# Altium PCB PCB1.PcbDoc
Units mm, origin at the board's own origin, x right, y up, seen from the top; angles counter-clockwise.
Board outline 15.24 x 19.05 mm, 2 copper layers (Top Layer, Bottom Layer), stack 1.173 mm thick; 6 components, 7 nets, 44 pads, 7 vias.
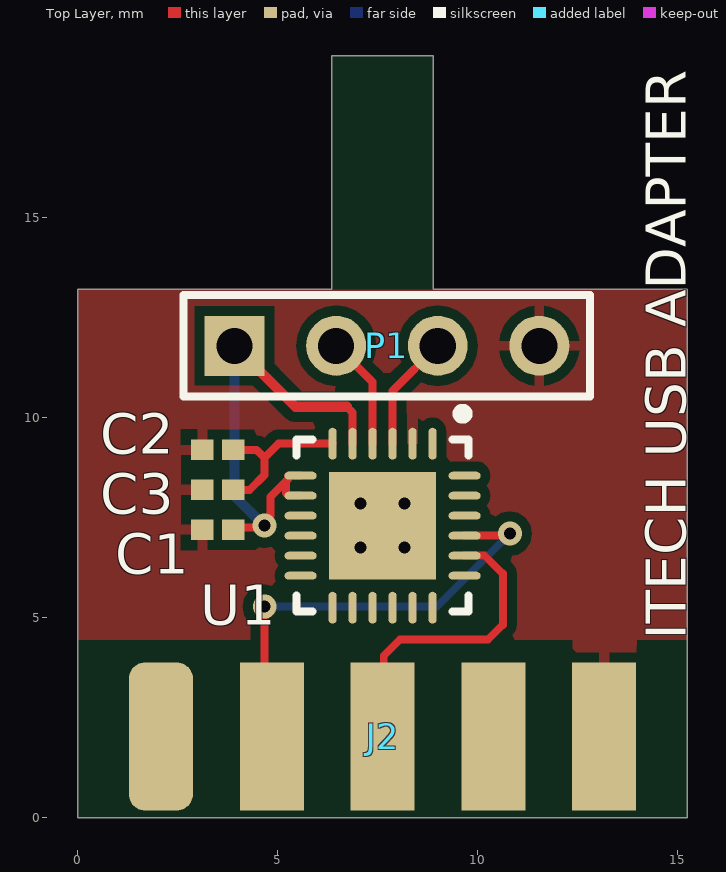
[diagram p0: Top Layer view]
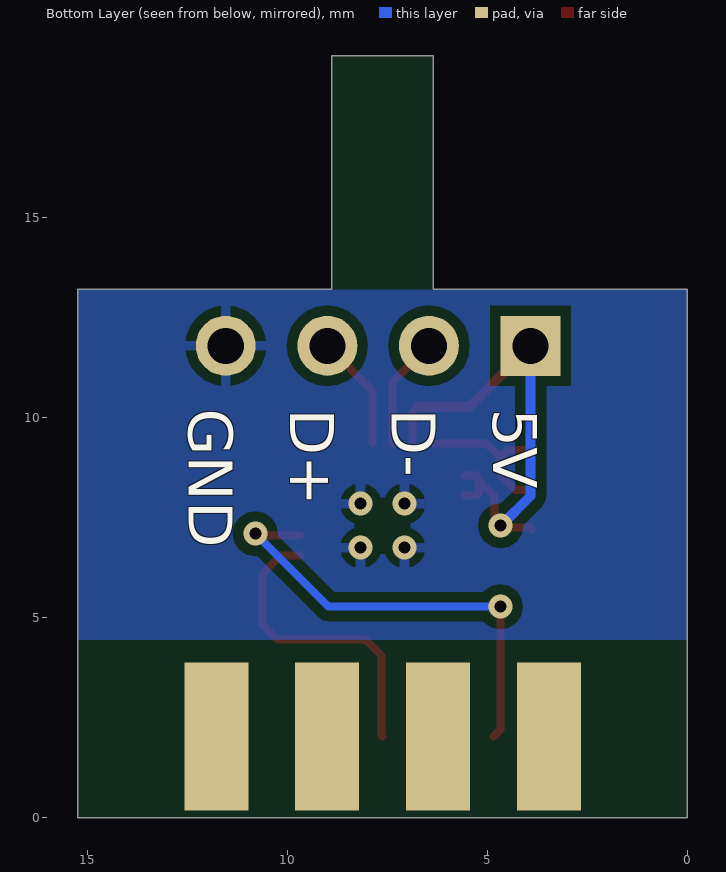
[diagram p1: Bottom Layer view, seen from below]

## Layer stack, top to bottom
Top Solder: solder mask 0.0127, Solder Resist, Dk 3.8
Top Layer: signal copper 0.0356
Dielectric 1: dielectric 1.102, FR-4, Dk 4.8
Bottom Layer: signal copper 0.0356
Bottom Solder: solder mask 0.0127, Solder Resist, Dk 3.8

## Board outline
0,0 0,13.208 6.35,13.208 6.35,19.05 8.89,19.05 8.89,13.208 15.24,13.208 15.24,0

## Design rules (kind name [scope] priority, off if disabled: settings)
Clearance [All] p1: gap=0.254 ignorepadtopadclearanceinfootprint=FALSE except(0: Arc-Hole Track-Hole SMDPad-Hole THPad-Hole Via-Hole Fill-Hole Poly-Hole Region-Hole Text-Hole)
PolygonConnect [All] p1: connectstyle=Relief reliefconductorwidth=0.254 reliefentries=4 polygonreliefangle="90 Angle" airgapwidth=0.254
RoomDefinition Sheet1 [InComponentClass('Sheet1')] p1: confinementstyle=ConfineIn formatcopy=TRUE lockcomponents=FALSE outline -14.1,-17.7 29.8,-17.7 29.8,25.5 -14.1,25.5
RoutingVias [All] p1: holewidth=0.711 width=1.27 viastyle="Through Hole" minholewidth=0.3 minwidth=0.6 maxholewidth=0.711 maxwidth=1.27
SolderMaskExpansion SolderMaskExpansion_via [isvia] p1: expansion=-99 istentingtop=FALSE
SolderMaskExpansion [All] p2: expansion=0.102 istentingtop=FALSE
Width [All] p1: maxlimit=0.254 minlimit=0.2 preferedwidth=0.254
30 further rules are at their usual default settings.

## Components (designator, comment, footprint, x,y, rotation, side; value= is the part's Value field where it differs from the comment)
C1 "1uF" CAPC1005X06L 3.5,7.2 r180 top
C2 "0.10uF" CAPC1005X06L 3.5,9.2 r0 top
C3 "4.7uF" CAPC1005X06L 3.5,8.2 r180 top
J2 "171-009-103L001" 171-009-103L001 7.62,2.032 r0 top
P1 "Header 4" HDR1X4 3.92,11.8 r0 top
U1 "CP2104-F03-GM" SLAB-QFN-24-2675x2675TP_M 7.62,7.3 r270 top

## Footprints (in the part's own frame and the unit in brackets; to place one, negate y for a bottom-side part, rotate by r counter-clockwise, add the part's x,y. Pads: shape width x height; smd on the part's side, far side on the other; paste and mask are expansions set on the pad)
171-009-103L001 [mm] "CONN D-SUB PLUG 9POS PNL MNT"
  rrect50% 1.6x3.7 smd: 1(-5.54,0)
  rect 1.6x3.7 smd: 2(-2.77,0) 3(0,0) 4(2.77,0) 5(5.54,0)
  rect 1.6x3.7 smd far side: 6(-4.155,0) 7(-1.385,0) 8(1.385,0) 9(4.155,0)
  body extent -15.41,-13.84 15.41,1.37, height 5.6
CAPC1005X06L [mm] "Chip Capacitor, 2-Leads, Body 1.00x0.50mm, IPC High Density"
  rect 0.56x0.52 smd: 1(-0.39,0) 2(0.39,0)
  body extent -0.53,-0.28 0.53,0.28, height 0.55
HDR1X4 [mm] "Connector; Header; 4 Position"
  rect 1.5x1.5 hole 0.9: 1(0,0)
  round 1.5 hole 0.9: 2(2.54,0) 3(5.08,0) 4(7.62,0)
  silkscreen extent -1.27,-1.27 8.89,1.27
SLAB-QFN-24-2675x2675TP_M [mm] "QFN, 24-Leads, Body 4x4mm, Pitch 0.5mm, Thermal Pad 2.68x2.68mm, IPC Low Density"
  oval 0.8x0.2 smd: 1(-2.05,1.25) 2(-2.05,0.75) 3(-2.05,0.25) 4(-2.05,-0.25) 5(-2.05,-0.75) 6(-2.05,-1.25) 13(2.05,-1.25) 14(2.05,-0.75) 15(2.05,-0.25) 16(2.05,0.25) 17(2.05,0.75) 18(2.05,1.25)
  oval 0.2x0.8 smd: 7(-1.25,-2.05) 8(-0.75,-2.05) 9(-0.25,-2.05) 10(0.25,-2.05) 11(0.75,-2.05) 12(1.25,-2.05) 19(1.25,2.05) 20(0.75,2.05) 21(0.25,2.05) 22(-0.25,2.05) 23(-0.75,2.05) 24(-1.25,2.05)
  rect 2.68x2.68 smd: 25(0,0)
  silkscreen extent -2.92,-2.15 2.15,2.15, body extent -2,-2 2,2, height 0.8

## Part data
C1: library part GRM155R61A105KE15D, "CAP CER 1UF 10V X5R 0402", Case/Package=0402, Digi-Key Part Number=490-3890-1-ND, Manufacturer="Murata Electronics North America", Operating Temperature="-55°C ~ 85°C", Package / Case="0402 (1005 Metric)", Temperature Coefficient=X5R, Tolerance=±10%, Voltage=10V, Applications="General Purpose", Datasheets=http://www.murata.com/~/media/webrenewal/support/library/catalog/products/capacitor/mlcc/c02e.pdf, Features=-, Image=//media.digikey.com/Renders/Murata%20Renders/ZRB-SERIES-0402.jpg, Packaging="Cut Tape (CT)", PartNumber=GRM155R61A105KE15D, Series=GRM
C2: library part GRM152R61A104ME19D, "CAP CER 0.1UF 10V X5R 0402", Case/Package=0402, Digi-Key Part Number=490-10009-1-ND, Manufacturer="Murata Electronics North America", Operating Temperature="-55°C ~ 85°C", Package / Case="0402 (1005 Metric)", Temperature Coefficient=X5R, Tolerance=±20%, Voltage=10V, Applications="General Purpose", Datasheets=http://www.murata.com/~/media/webrenewal/support/library/catalog/products/capacitor/mlcc/c02e.pdf, Features="Derating Recommended", Image=//media.digikey.com/Renders/Murata%20Renders/ZRB-SERIES-0402.jpg, Packaging="Cut Tape (CT)", PartNumber=GRM152R61A104ME19D, Series=GRM
C3: library part GRM155R60J475ME47D, "CAP CER 4.7UF 6.3V X5R 0402", Case/Package=0402, Digi-Key Part Number=490-5915-1-ND, Manufacturer="Murata Electronics North America", Operating Temperature="-55°C ~ 85°C", Package / Case="0402 (1005 Metric)", Temperature Coefficient=X5R, Tolerance=±20%, Voltage=6.3V, Applications="General Purpose", Datasheets=http://www.murata.com/~/media/webrenewal/support/library/catalog/products/capacitor/mlcc/c02e.pdf, Features="Derating Recommended", Image=//media.digikey.com/Renders/Murata%20Renders/ZRB-SERIES-0402.jpg, Packaging="Cut Tape (CT)", PartNumber=GRM155R60J475ME47D, Series=GRM
J2: "CONN D-SUB PLUG 9POS PNL MNT, side mount DSUB connector", Digikey PartNumber=209ME-ND, Manufacturer="NorComp Inc.", PartNumber=171-009-103L001
P1: "Header, 4-Pin", LatestRevisionDate=17-Jul-2002, LatestRevisionNote="Re-released for DXP Platform.", Publisher="Altium Limited"
U1: library part CMP-0511-00004-1, "Single-Chip USB to UART Bridge, 4 Dig I/O Pins, Internal Oscillator, 1024 Bytes EEPROM, -40 to 85 degC, 24-pin QFN", Manufacturer="Silicon Labs", Code_IPC=J-STD-020, Code_JEDEC=MO-220, ComponentLink1Description="Manufacturer URL", ComponentLink1URL=http://www.silabs.com/, ComponentLink2Description=Datasheet, ComponentLink2URL=http://www.silabs.com/Support%20Documents/TechnicalDocs/cp2104.pdf, ComponentLink3Description="Package Specification", ComponentLink3URL=http://www.silabs.com/Support%20Documents/TechnicalDocs/C8051F93x-92x.pdf, DatasheetVersion="Rev. 1.0", EEPROM="1024 Bytes", Internal Oscillator=TRUE, Mounting Technology="Surface Mount", PackageDescription="24-Pin Quad-Flat No-Leads Package, Body 4 x 4 mm, Pitch 0.5 mm", PackageReference=QFN-24, PartNumber=CP2104-F03-GM, Sub-Family="USB Bridges"

## Via types
v1: diameter 0.6, hole 0.3, Top Layer to Bottom Layer, 7 vias

## Nets (pads, with @x,y where several pads share a name; then routed paths per layer and width w, separated by ;. In a path a pad name is that pad's centre, name@x,y a point inside that pad or via, vN(x,y) a via of type N, cw(c..) or ccw(c..) an arc to the next point about the centre after c; other vN are vias at no path point)
3.3V_USB: C2.2 C3.1 U1.6 | length 4.1
  Top Layer w0.2: C3.1 4.3,8.2 4.67,8.57 4.67,9 ; C2.2 4.47,9.2 4.52,9.15 4.67,9 ; U1.6 5.02,9.35 4.67,9
5V_USB: C1.1 P1.1 U1.5 U1.7 U1.8 | length 12.5
  Top Layer w0.2: C1.1 3.94,7.25 4.616,7.25 v1(4.666,7.3) 4.666,7.408 4.816,7.559 4.816,8.023 5.207,8.413 ; U1.8 5.27,8.05 5.207,8.113 5.207,8.413 ; U1.7 5.27,8.55 5.27,8.477 5.207,8.413 ; 6.725,10.275 6.87,10.13 U1.5
  Top Layer w0.254: P1.1 4.902,10.818 5.445,10.275 6.725,10.275
  Bottom Layer w0.254: P1.1 3.92,8.046 v1(4.666,7.3)
GND: C1.2 C2.1 C3.2 J2.5 P1.4 U1.2 U1.25
  other v1: 7.07,6.75 8.17,6.75 7.07,7.85 8.17,7.85
RX: J2.3 U1.20 | length 7.7
  Top Layer w0.2: J2.3 7.65,2.062 7.65,4.05 8.05,4.45 10.25,4.45 10.625,4.825 10.625,6.1 10.175,6.55 U1.20
TX: J2.2 U1.21 | length 11.3
  Top Layer w0.2: v1(4.675,5.275) 4.675,2.207 J2.2 ; U1.21 10.75,7.05 v1(10.8,7.1)
  Bottom Layer w0.2: v1(4.675,5.275) 8.975,5.275 v1(10.8,7.1)
"USB D_N": P1.2 U1.4 | length 2.8
  Top Layer w0.2: P1.2 7.37,10.89 U1.4
"USB D_P": P1.3 U1.3 | length 2.9
  Top Layer w0.2: U1.3 7.87,10.67 P1.3
pads on no net: J2.1 J2.4 J2.6 J2.7 J2.8 J2.9 U1.1 U1.9 U1.10 U1.11 U1.12 U1.13 U1.14 U1.15 U1.16 U1.17 U1.18 U1.19 U1.22 U1.23 U1.24

## Polygon pours and split planes (outlines as drawn)
GND on Bottom Layer "NONET_L02_P-001" (solid, pour order 1): 0,13.2 15.24,13.2 15.24,4.445 0,4.445
no net on Bottom Layer "NONET_L02_P-001" (solid, pour order 0): 0,13.2
GND on Top Layer "NONET_L02_P-001" (solid, pour order 2): 0,13.2 15.24,13.2 15.24,4.445 13.975,4.445 13.96,3.882 12.36,3.882 12.375,4.445 0,4.445

## Silkscreen, mask and mechanical layers (free items; w line width, h text height)
Top Overlay:
  text "ITECH USB ADAPTER" at 15.199,4.45 h1 r90
Bottom Overlay:
  text "5V" at 4.85,10.225 h1.1 r90
  text "D-" at 7.39,10.225 h1.1 r90
  text "D+" at 9.93,10.225 h1.1 r90
  text "GND" at 12.47,10.225 h1.1 r90
Mechanical 1:
  the board outline again, w0.1